# EAGLE board SerLCD_16x4_WT-v01 (EAGLE 7.6.0)

Size 73.66 x 99.06 mm. Coordinates in mm from the lower left corner, seen from the top.
Outline: 2.54,0 arc-90 0,2.54 0,96.52 arc-90 2.54,99.06 7.62,99.06 7.62,0 2.54,0
Outline: 66.04,93.98 66.04,96.52 arc90 63.5,99.06 10.16,99.06 10.16,0 63.5,0 arc90 66.04,2.54 66.04,5.08 arc-90 68.58,7.62 71.12,7.62 arc90 73.66,10.16 73.66,88.9 arc90 71.12,91.44 68.58,91.44 arc-90 66.04,93.98
Outline: 24.13,90.68 24.13,9.65 54.61,9.65 54.61,90.68 24.13,90.68
Copper layers (1*16): Top 0.035mm / dielectric 1.5mm / Bottom 0.035mm
Design rules "SparkFun-2-layer-TIGHT *": minimum track width 10mil, minimum drill 15mil, track to track 7mil, track to pad 7mil, pad to pad 7mil, via to via 7mil, smd to smd 7mil, copper to edge 7mil, drill to drill 7mil, minimum pad ring 7mil, minimum via ring 7mil, stop-mask expansion 4mil, vias tented up to drill 25mil, thermal gap 10mil
Net classes: 1 vcc1: width 0.203 mm; 3 VCC2: width 0.381 mm, drill 0.508 mm, clearance 0.254 mm to class 0; 8 eight_mil: width 0.203 mm, clearance 0.127 mm; 9 twelve_mil: width 0.305 mm, clearance 0.127 mm; 10 twenty_mil: width 0.508 mm, clearance 0.127 mm; 11 thirty_mil: width 0.762 mm, clearance 0.127 mm; 13 20_mil: width 0.508 mm, drill 0.508 mm

## Footprints (pad centres in the part's own frame; a part is rotated, then mirrored left to right if it is on the bottom)
GOLD_HINGE_HS+WT = hole 2.794: 14.224,4.077; 14.224,15.07; 3.81,4.077; 3.81,15.07

## Placement (x,y rotation side)
U$2  [SRE_LCD_16X2_REF_ONLY]  57.15,10.16 90 top
U$6  GOLD_HINDGEHS+WT  [GOLD_HINGE_HS+WT]  0,80.01 0 top
U$7  GOLD_HINDGEHS+WT  [GOLD_HINGE_HS+WT]  0,0 0 top

## Library data of the parts
U$2 = SerLCD_dimensions
U$6 U$7 = Testing

## Text on the board
Bottom: v01 (11/15/2016) Plewis
Dimension: ROUTE OUT | ROUTE OUT | ROUTE OUT
tPlace: WT | Serial LCD 16x4 | #579